# EAGLE board JDM2_NoSocket.Old (EAGLE 7.2.0)
JDM2 without DIL-Socket
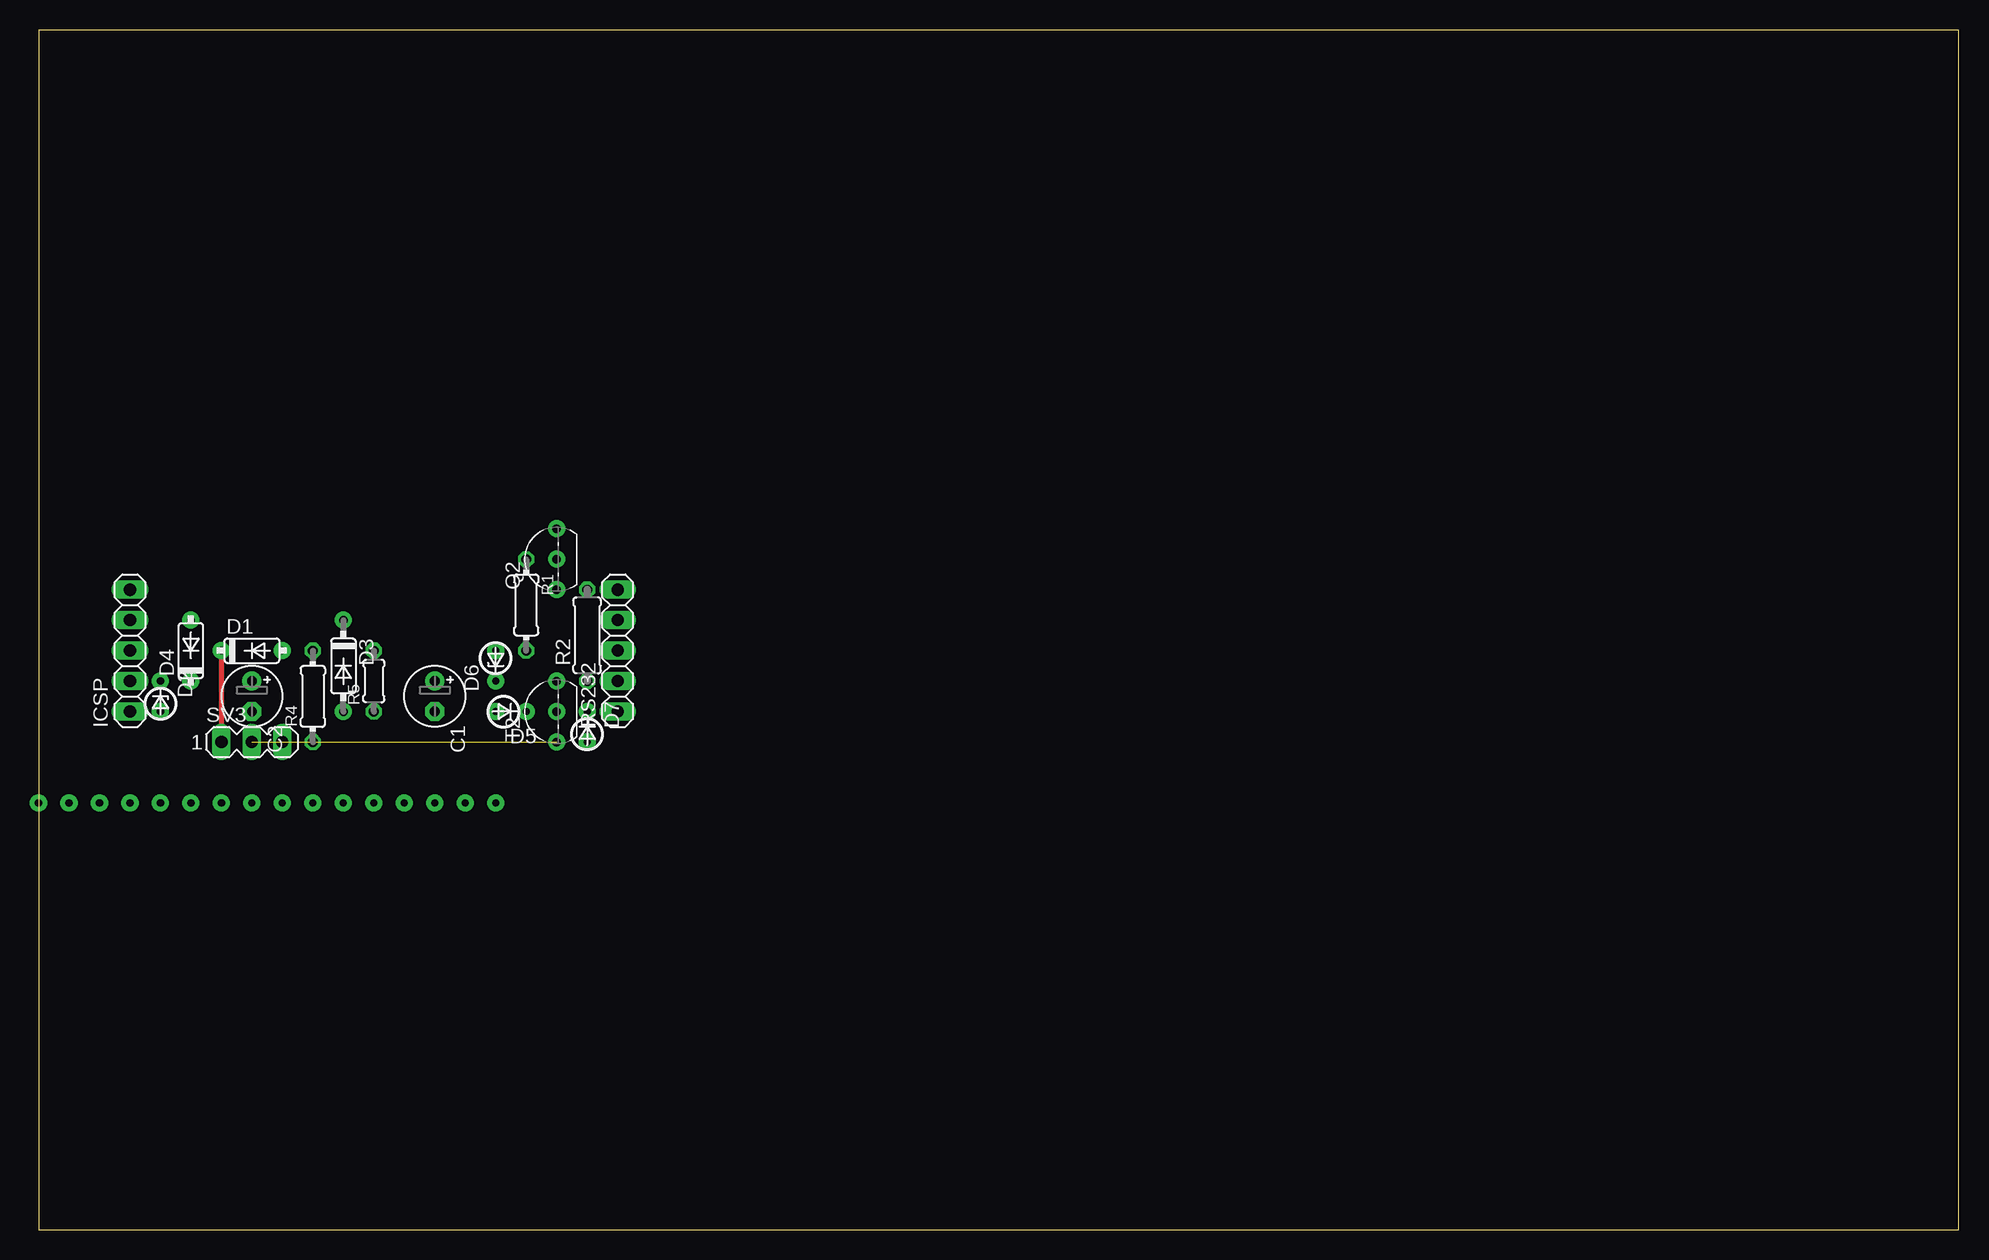
[diagram p0: board, top side]
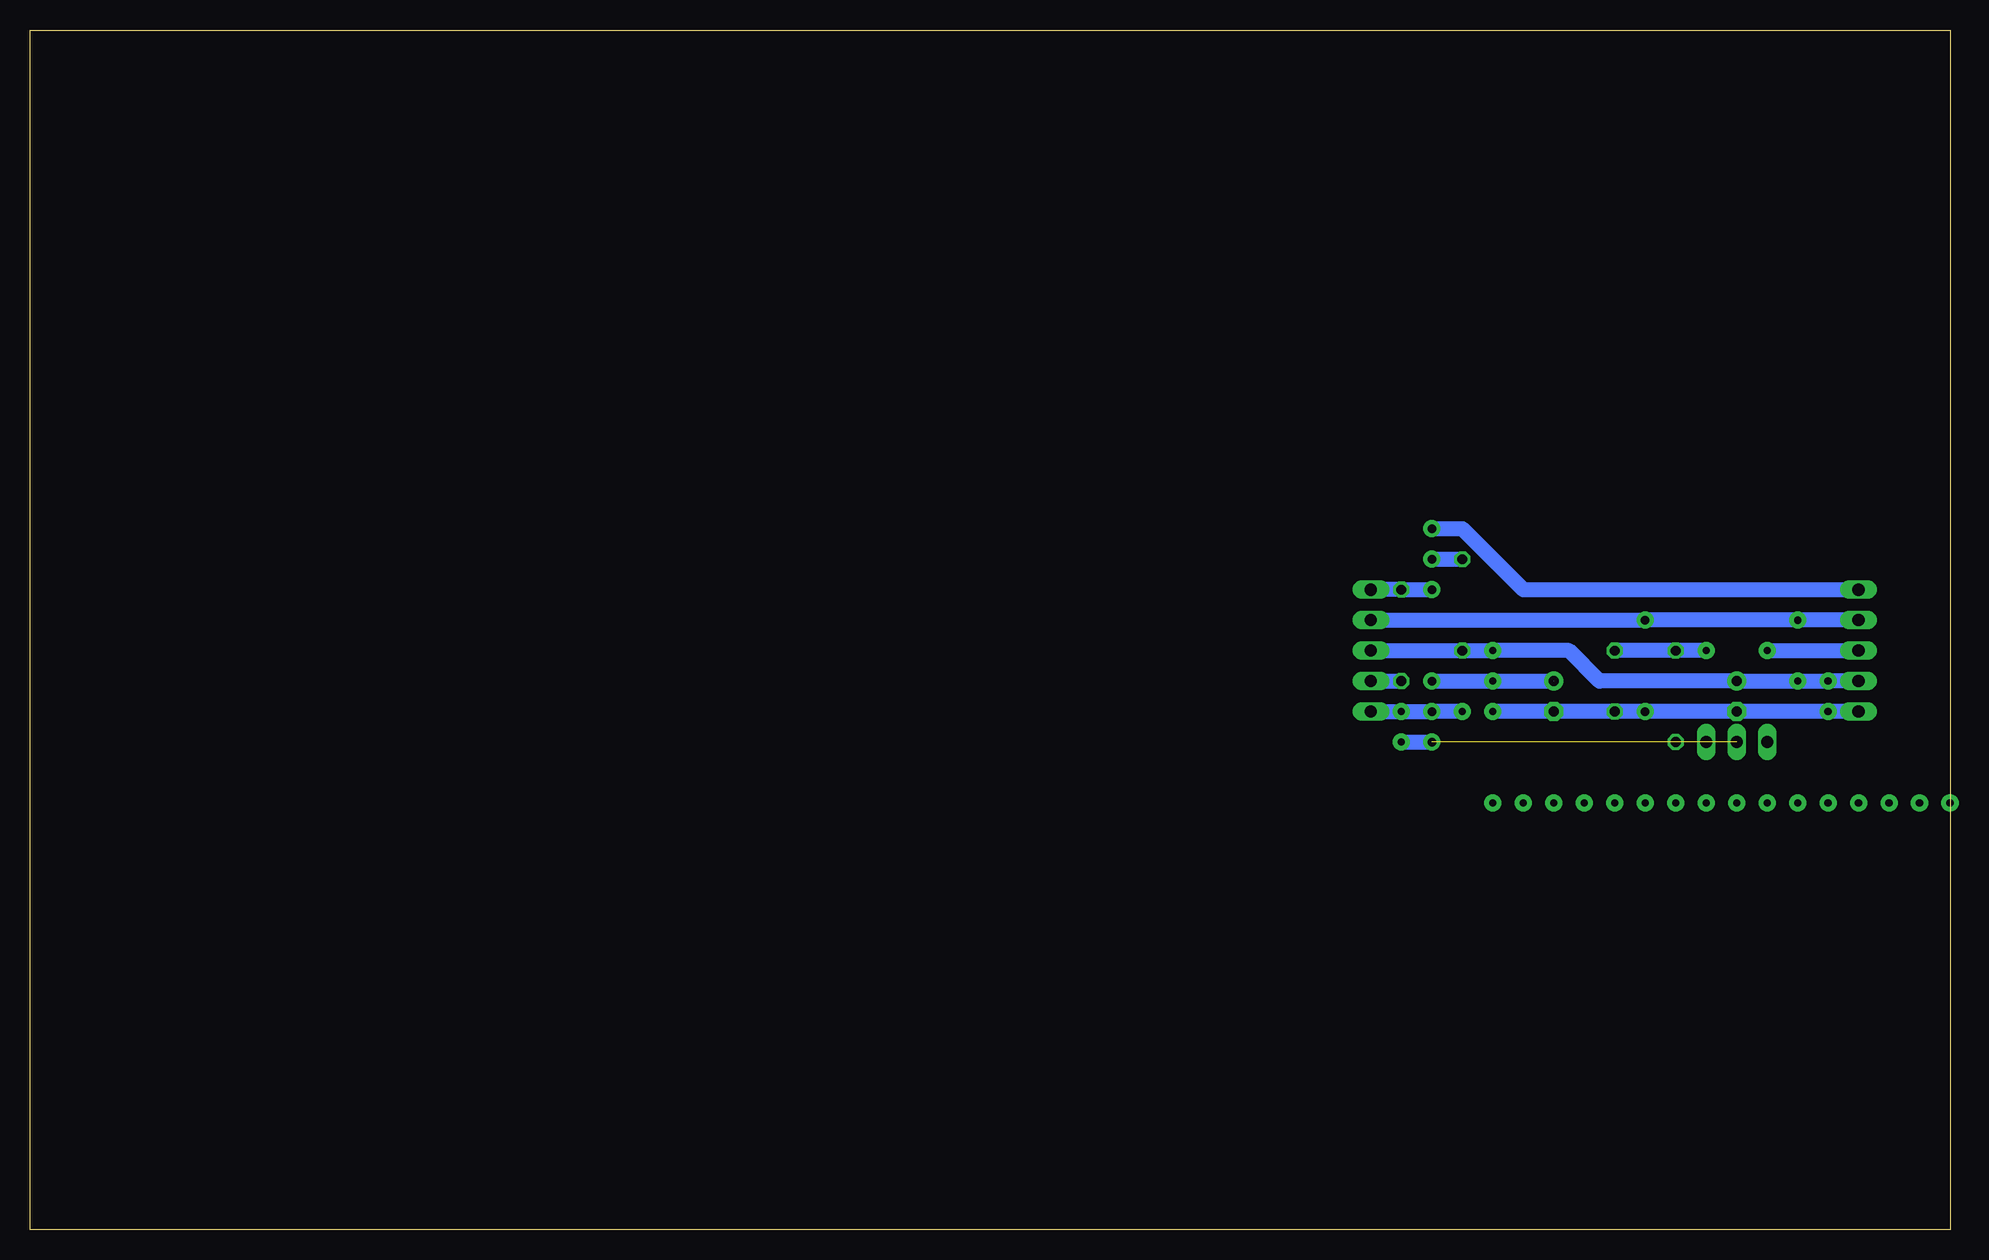
[diagram p1: board, bottom side, seen from below]

Size 160 x 100 mm. Coordinates in mm from the lower left corner, seen from the top.
Outline: 0,0 160,0 160,100 0,100 0,0
Copper layers (1*16): Top 0.035mm / dielectric 1.5mm / Bottom 0.035mm
Design rules "default": minimum track width 10mil, minimum drill 24mil, track to track 8mil, track to pad 8mil, pad to pad 8mil, via to via 8mil, smd to smd 8mil, copper to edge 40mil, drill to drill 8mil, minimum pad ring 10mil, minimum via ring 8mil, stop-mask expansion 4mil, vias tented up to drill 0mil, thermal gap 10mil

## Footprints (pad centres in the part's own frame; a part is rotated, then mirrored left to right if it is on the bottom)
E2,5-5 = drill 0.813 pad 1.6: + -1.27,0 | drill 0.813 pad 1.6 octagon: - 1.27,0
DO35-5 = drill 0.6 pad 1.422: A 2.54,0; C -2.54,0
DO35Z2_54 = drill 0.6 pad 1.422: A 1.27,0; C -1.27,0
DO35-7 = drill 0.7 pad 1.422: A 3.81,0; C -3.81,0
DO35-2_54 = drill 0.6 pad 1.422: A 1.27,0; C -1.27,0
1X05 = drill 1.016 long: 1 -5.08,0; 2 -2.54,0; 3 0,0; 4 2.54,0; 5 5.08,0
TO92-CBE = drill 0.7 pad 1.422: B 0,0; C -2.54,0; E 2.54,0
0204/7 = drill 0.813 octagon: 1 -3.81,0; 2 3.81,0
0207/7 = drill 0.813 octagon: 1 -3.81,0; 2 3.81,0
0204/5 = drill 0.813 octagon: 1 -2.54,0; 2 2.54,0
MA03-1 = drill 1.016 long: 1 -2.54,0; 2 0,0; 3 2.54,0

## Placement (x,y rotation side)
C1  100u  [E2,5-5]  33.02,44.45 270 top
C2  22u  [E2,5-5]  17.78,44.45 270 top
D1  2N4148  [DO35-5]  17.78,48.26 0 top
D2  Z5.1V  [DO35Z2_54]  10.16,44.45 270 top
D3  2N41487  [DO35-7]  25.4,46.99 270 top
D4  2N41485  [DO35-5]  12.7,48.26 90 top
D5  2N4148  [DO35-2_54]  39.37,43.18 180 top
D6  Z8.1V  [DO35Z2_54]  38.1,46.99 90 top
D7  2N4148  [DO35-2_54]  45.72,41.91 270 top
ICSP  [1X05]  7.62,48.26 90 top
Q2  BC547  [TO92-CBE]  43.18,55.88 90 top
R1  10kΩ  [0204/7]  40.64,52.07 270 top
R2  1.5kΩ  [0207/7]  45.72,49.53 90 top
R4  1kΩ  [0204/7]  22.86,44.45 90 top
R5  15kΩ  [0204/5]  27.94,45.72 90 top
RS232  [1X05]  48.26,48.26 90 top
SV3  [MA03-1]  17.78,40.64 0 top
T2  BC547  [TO92-CBE]  43.18,43.18 90 top

## Library data of the parts
C1 C2 R1 R2 R4 R5 = rcl
D1-D7 Q2 T2 = JDM2
ICSP RS232 = pinhead
SV3 = con-lstb; OC_FARNELL: unknown; OC_NEWARK: unknown

## Nets
DTR: R2.1 RS232.2
MCLR: D1.C ICSP.3 SV3.1
N$3: Q2.B R1.1
N$4: D7.A SV3.2 T2.C
N$5: R4.1 SV3.3
N$8: C1.+ D6.C T2.E
N$9: D1.A R4.2 R5.2
PGC: D3.C D4.A ICSP.4 RS232.4
PGD: ICSP.5 Q2.E
RTS: Q2.C R2.2 RS232.5
TXD: D5.C D7.C RS232.1 T2.B
VDD: C2.+ D2.C D4.C D6.A ICSP.2 R1.2 RS232.3
VSS: C1.- C2.- D2.A D3.A D5.A ICSP.1 R5.1

## Tracks (layer width: path | path; a pad name or v marks a point on that pad's centre or on a via)
DTR
  Bottom 1.27: RS232.2 R2.1
MCLR
  Top 0.406: D1.C SV3.1
  Bottom 1.27: D1.C ICSP.3
N$1  (via drill 0.6 pad 1.42)
  other vias: 0,35.56
N$2  (via drill 0.6 pad 1.42)
  other vias: 2.54,35.56
N$3
  Bottom 1.27: Q2.B R1.1
N$4  (1 unrouted)
  Bottom 1.27: D7.A T2.C
N$5  (1 unrouted)
N$7  (via drill 0.6 pad 1.42)
  other vias: 5.08,35.56
N$8  (1 unrouted)
  Bottom 1.27: T2.E D6.C C1.+
N$9
  Bottom 1.27: D1.A R4.2 R5.2
N$10  (via drill 0.6 pad 1.42)
  other vias: 7.62,35.56
N$11  (via drill 0.6 pad 1.42)
  other vias: 10.16,35.56
N$12  (via drill 0.6 pad 1.42)
  other vias: 12.7,35.56
N$13  (via drill 0.6 pad 1.42)
  other vias: 15.24,35.56
N$14  (via drill 0.6 pad 1.42)
  other vias: 17.78,35.56
N$15  (via drill 0.6 pad 1.42)
  other vias: 20.32,35.56
N$16  (via drill 0.6 pad 1.42)
  other vias: 22.86,35.56
N$17  (via drill 0.6 pad 1.42)
  other vias: 25.4,35.56
N$18  (via drill 0.6 pad 1.42)
  other vias: 27.94,35.56
N$19  (via drill 0.6 pad 1.42)
  other vias: 30.48,35.56
N$20  (via drill 0.6 pad 1.42)
  other vias: 33.02,35.56
N$21  (via drill 0.6 pad 1.42)
  other vias: 35.56,35.56
N$22  (via drill 0.6 pad 1.42)
  other vias: 38.1,35.56
PGC
  Bottom 1.27: RS232.4 D3.C D4.A ICSP.4
PGD
  Bottom 1.27: Q2.E 40.64,58.42 35.56,53.34 ICSP.5
RTS
  Bottom 1.27: RS232.5 R2.2 Q2.C
TXD
  Bottom 1.27: RS232.1 D7.C T2.B D5.C
VDD
  Bottom 1.27: RS232.3 R1.2 D6.A 31.75,48.26 29.21,45.72 C2.+ D4.C D2.C ICSP.2
VSS
  Bottom 1.27: ICSP.1 D2.A C2.- D3.A R5.1 C1.- D5.A